# Altium PCB Attempt 2 - ClassD.PcbDoc (part 2 of 2)
Units mm, origin at the board's own origin, x right, y up, seen from the top; angles counter-clockwise.
Board outline 106 x 65 mm, 2 copper layers (Top Layer, Bottom Layer), stack 1.569 mm thick; 59 components, 29 nets, 154 pads, 172 vias.
Unrouted connection lines stored in the file: 2.
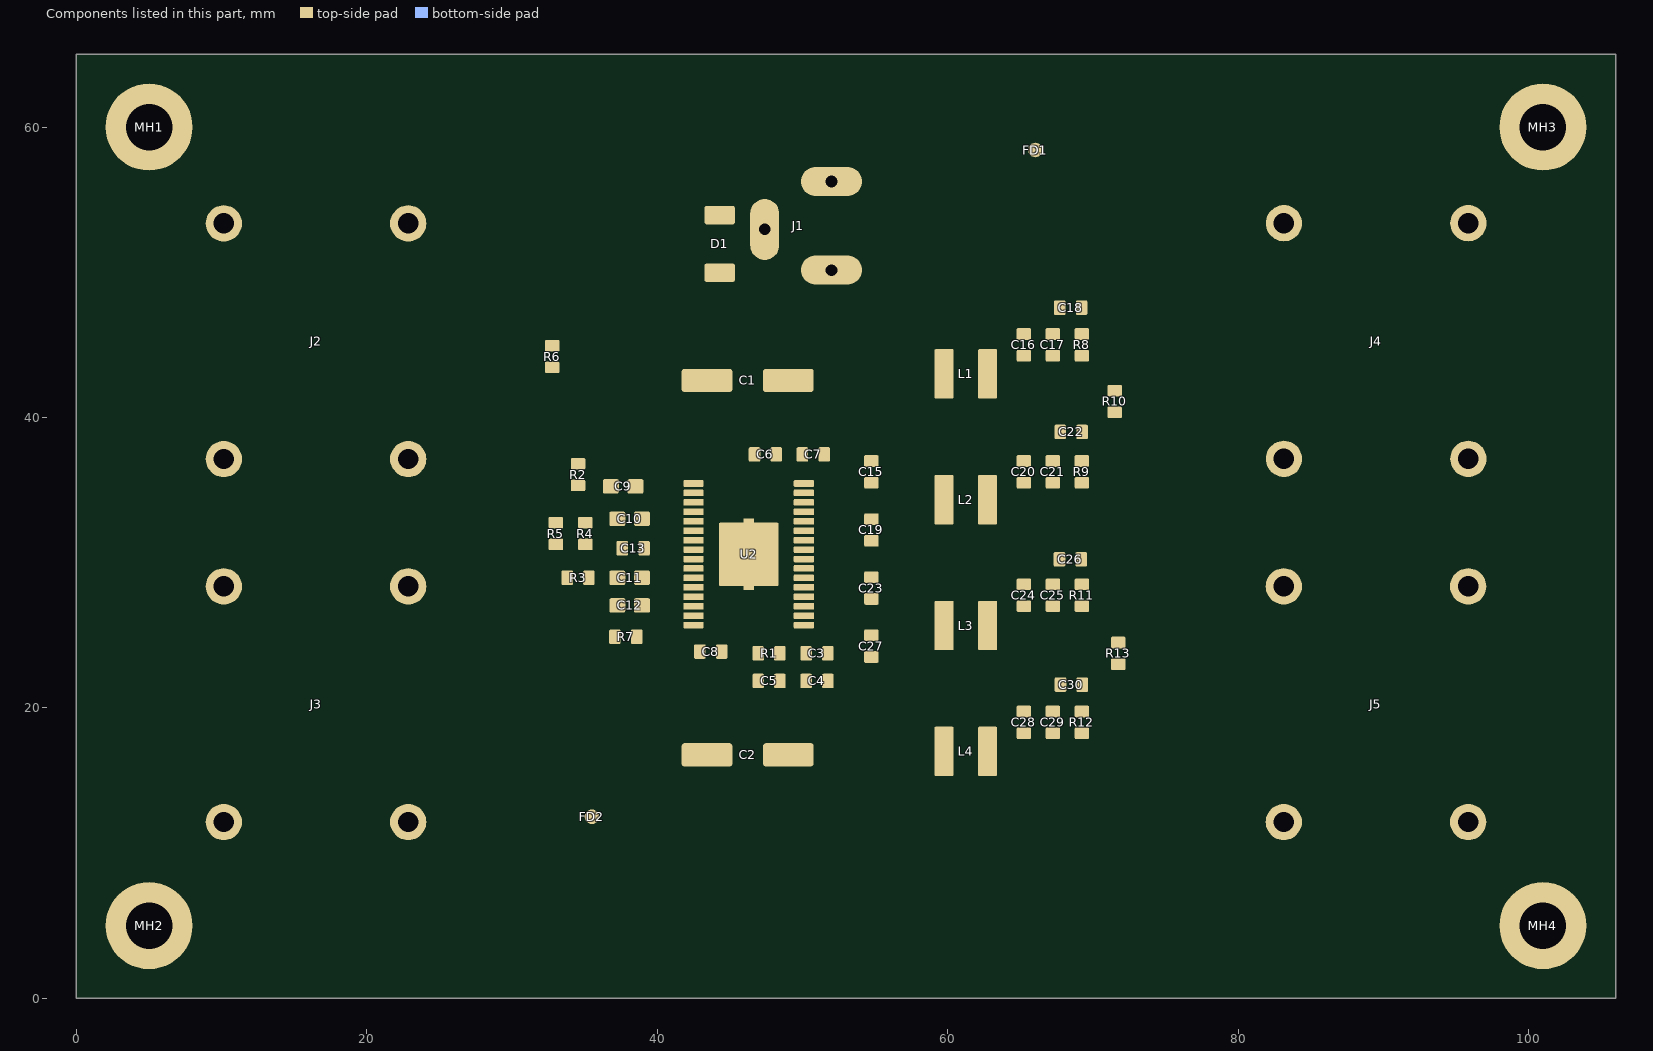
[diagram p2: the components of this part, seen from the top]

## Silkscreen, mask and mechanical layers (free items; w line width, h text height) (continued)
FEB note:
  text "N" at 0,283.767 h4.6
  text "O" at 3.006,283.767 h4.6
  text "T" at 6.011,283.767 h4.6
  text "E" at 8.043,283.767 h4.6
  text "S" at 10.371,283.767 h4.6
  text ":" at 12.784,283.767 h4.6
  text "U" at 14.858,283.767 h4.6
  text "N" at 17.737,283.767 h4.6
  text "L" at 20.743,283.767 h4.6
  text "E" at 22.817,283.767 h4.6
  text "S" at 25.187,283.767 h4.6
  text "S" at 27.558,283.767 h4.6
  text "O" at 30.818,283.767 h4.6
  text "T" at 33.823,283.767 h4.6
  text "H" at 35.855,283.767 h4.6
  text "E" at 38.818,283.767 h4.6
  text "R" at 41.147,283.767 h4.6
  text "W" at 43.729,283.767 h4.6
  text "I" at 47.496,283.767 h4.6
  text "S" at 48.597,283.767 h4.6
  text "E" at 51.01,283.767 h4.6
  text "S" at 54.227,283.767 h4.6
  text "P" at 56.64,283.767 h4.6
  text "E" at 59.095,283.767 h4.6
  text "C" at 61.423,283.767 h4.6
  text "I" at 64.344,283.767 h4.6
  text "F" at 65.445,283.767 h4.6
  text "I" at 67.646,283.767 h4.6
  text "E" at 68.747,283.767 h4.6
  text "D" at 71.117,283.767 h4.6
  text "." at 73.869,283.767 h4.6
  text "1" at 0,275.767 h4.6
  text "." at 2.244,275.767 h4.6
  text "F" at 4.318,275.767 h4.6
  text "A" at 6.392,275.767 h4.6
  text "B" at 8.89,275.767 h4.6
  text "R" at 11.43,275.767 h4.6
  text "I" at 14.012,275.767 h4.6
  text "C" at 15.112,275.767 h4.6
  text "A" at 18.033,275.767 h4.6
  text "T" at 20.319,275.767 h4.6
  text "E" at 22.351,275.767 h4.6
  text "P" at 25.567,275.767 h4.6
  text "E" at 28.023,275.767 h4.6
  text "R" at 30.393,275.767 h4.6
  text "I" at 33.822,275.767 h4.6
  text "P" at 34.923,275.767 h4.6
  text "C" at 37.336,275.767 h4.6
  text "-" at 40.298,275.767 h4.6
  text "6" at 41.695,275.767 h4.6
  text "0" at 43.939,275.767 h4.6
  text "1" at 46.182,275.767 h4.6
  text "2" at 48.468,275.767 h4.6
  text "A" at 50.712,275.767 h4.6
  text "C" at 54.056,275.767 h4.6
  text "L" at 56.977,275.767 h4.6
  text "A" at 59.136,275.767 h4.6
  text "S" at 61.676,275.767 h4.6
  text "S" at 64.046,275.767 h4.6
  text "2" at 67.306,275.767 h4.6
  text "." at 69.55,275.767 h4.6
  text "2" at 0,267.808 h4.6
  text "." at 2.244,267.808 h4.6
  text "M" at 4.318,267.808 h4.6
  text "A" at 7.662,267.808 h4.6
  text "T" at 9.948,267.808 h4.6
  text "E" at 11.98,267.808 h4.6
  text "R" at 14.35,267.808 h4.6
  text "I" at 16.933,267.808 h4.6
  text "A" at 18.033,267.808 h4.6
  text "L" at 20.531,267.808 h4.6
  text ":" at 22.647,267.808 h4.6
  text "D" at 4.275,259.808 h4.6
  text "I" at 7.196,259.808 h4.6
  text "E" at 8.297,259.808 h4.6
  text "L" at 10.667,259.808 h4.6
  text "E" at 12.784,259.808 h4.6
  text "C" at 15.112,259.808 h4.6
  text "T" at 17.948,259.808 h4.6
  text "R" at 19.98,259.808 h4.6
  text "I" at 22.562,259.808 h4.6
  text "C" at 23.663,259.808 h4.6
  text ":" at 26.583,259.808 h4.6
  text "F" at 28.658,259.808 h4.6
  text "R" at 30.859,259.808 h4.6
  text "4" at 33.441,259.808 h4.6
  text "P" at 36.531,259.808 h4.6
  text "E" at 38.987,259.808 h4.6
  text "R" at 41.315,259.808 h4.6
  text "I" at 44.744,259.808 h4.6
  text "P" at 45.844,259.808 h4.6
  text "C" at 48.257,259.808 h4.6
  text "-" at 51.22,259.808 h4.6
  text "4" at 52.659,259.808 h4.6
  text "1" at 54.902,259.808 h4.6
  text "0" at 57.146,259.808 h4.6
  text "1" at 59.389,259.808 h4.6
  text "W" at 62.522,259.808 h4.6
  text "I" at 66.29,259.808 h4.6
  text "T" at 67.39,259.808 h4.6
  text "H" at 69.422,259.808 h4.6
  text "M" at 73.274,259.808 h4.6
  text "I" at 76.619,259.808 h4.6
  text "N" at 77.719,259.808 h4.6
  text "T" at 81.571,259.808 h4.6
  text "G" at 83.519,259.808 h4.6
  text "1" at 87.371,259.808 h4.6
  text "8" at 89.614,259.808 h4.6
  text "0" at 91.858,259.808 h4.6
  text "D" at 94.991,259.808 h4.6
  text "E" at 97.911,259.808 h4.6
  text "G" at 100.24,259.808 h4.6
  text "R" at 103.245,259.808 h4.6
  text "E" at 105.827,259.808 h4.6
  text "E" at 108.198,259.808 h4.6
  text "C" at 111.415,259.808 h4.6
  text "." at 114.209,259.808 h4.6
  text "C" at 4.275,251.807 h4.6
  text "O" at 7.196,251.807 h4.6
  text "P" at 10.286,251.807 h4.6
  text "P" at 12.742,251.807 h4.6
  text "E" at 15.197,251.807 h4.6
  text "R" at 17.568,251.807 h4.6
  text ":" at 20.15,251.807 h4.6
  text "A" at 22.224,251.807 h4.6
  text "S" at 24.722,251.807 h4.6
  text "P" at 27.981,251.807 h4.6
  text "E" at 30.394,251.807 h4.6
  text "R" at 32.765,251.807 h4.6
  text "S" at 36.194,251.807 h4.6
  text "T" at 38.522,251.807 h4.6
  text "A" at 40.342,251.807 h4.6
  text "C" at 42.713,251.807 h4.6
  text "K" at 45.634,251.807 h4.6
  text "U" at 47.919,251.807 h4.6
  text "P" at 50.798,251.807 h4.6
  text "." at 52.661,251.807 h4.6
  text "U" at 4.275,243.806 h4.6
  text "." at 7.069,243.806 h4.6
  text "L" at 8.297,243.806 h4.6
  text "." at 10.413,243.806 h4.6
  text "R" at 12.488,243.806 h4.6
  text "A" at 15.028,243.806 h4.6
  text "T" at 17.314,243.806 h4.6
  text "I" at 19.345,243.806 h4.6
  text "N" at 20.446,243.806 h4.6
  text "G" at 23.452,243.806 h4.6
  text ":" at 26.457,243.806 h4.6
  text "9" at 28.531,243.806 h4.6
  text "4" at 30.775,243.806 h4.6
  text "V" at 33.019,243.806 h4.6
  text "-" at 35.303,243.806 h4.6
  text "0" at 36.743,243.806 h4.6
  text "M" at 39.833,243.806 h4.6
  text "I" at 43.219,243.806 h4.6
  text "N" at 44.32,243.806 h4.6
  text "I" at 47.326,243.806 h4.6
  text "M" at 48.426,243.806 h4.6
  text "U" at 51.77,243.806 h4.6
  text "M" at 54.649,243.806 h4.6
  text "3" at 0,235.848 h4.6
  text "." at 2.243,235.848 h4.6
  text "S" at 4.318,235.848 h4.6
  text "U" at 6.688,235.848 h4.6
  text "R" at 9.567,235.848 h4.6
  text "F" at 12.149,235.848 h4.6
  text "A" at 14.223,235.848 h4.6
  text "C" at 16.636,235.848 h4.6
  text "E" at 19.557,235.848 h4.6
  text "F" at 22.774,235.848 h4.6
  text "I" at 24.976,235.848 h4.6
  text "N" at 26.076,235.848 h4.6
  text "I" at 29.082,235.848 h4.6
  text "S" at 30.182,235.848 h4.6
  text "H" at 32.595,235.848 h4.6
  text ":" at 35.601,235.848 h4.6
  text "E" at 37.674,235.848 h4.6
  text "N" at 40.044,235.848 h4.6
  text "I" at 43.008,235.848 h4.6
  text "G" at 44.108,235.848 h4.6
  text "4" at 0,227.847 h4.6
  text "." at 2.243,227.847 h4.6
  text "S" at 4.318,227.847 h4.6
  text "O" at 6.731,227.847 h4.6
  text "L" at 9.821,227.847 h4.6
  text "D" at 11.937,227.847 h4.6
  text "E" at 14.858,227.847 h4.6
  text "R" at 17.229,227.847 h4.6
  text "M" at 20.657,227.847 h4.6
  text "A" at 24.001,227.847 h4.6
  text "S" at 26.499,227.847 h4.6
  text "K" at 28.912,227.847 h4.6
  text "O" at 32.171,227.847 h4.6
  text "N" at 35.262,227.847 h4.6
  text "B" at 39.114,227.847 h4.6
  text "O" at 41.611,227.847 h4.6
  text "T" at 44.617,227.847 h4.6
  text "H" at 46.649,227.847 h4.6
  text "S" at 50.501,227.847 h4.6
  text "I" at 52.914,227.847 h4.6
  text "D" at 54.015,227.847 h4.6
  text "E" at 56.893,227.847 h4.6
  text "S" at 59.264,227.847 h4.6
  text "O" at 62.523,227.847 h4.6
  text "F" at 65.614,227.847 h4.6
  text "T" at 68.661,227.847 h4.6
  text "H" at 70.693,227.847 h4.6
  text "E" at 73.699,227.847 h4.6
  text "B" at 76.916,227.847 h4.6
  text "O" at 79.456,227.847 h4.6
  text "A" at 82.462,227.847 h4.6
  text "R" at 84.959,227.847 h4.6
  text "D" at 87.541,227.847 h4.6
  text "S" at 91.309,227.847 h4.6
  text "H" at 93.722,227.847 h4.6
  text "A" at 96.727,227.847 h4.6
  text "L" at 99.225,227.847 h4.6
  text "L" at 101.342,227.847 h4.6
  text "B" at 104.305,227.847 h4.6
  text "E" at 106.845,227.847 h4.6
  text "I" at 110.058,227.847 h4.6
  text "P" at 111.159,227.847 h4.6
  text "C" at 113.572,227.847 h4.6
  text "-" at 116.535,227.847 h4.6
  text "S" at 117.974,227.847 h4.6
  text "M" at 120.387,227.847 h4.6
  text "-" at 123.731,227.847 h4.6
  text "8" at 125.128,227.847 h4.6
  text "4" at 127.372,227.847 h4.6
  text "0" at 129.615,227.847 h4.6
  text "C" at 131.901,227.847 h4.6
  text "A" at 135.668,227.847 h4.6
  text "N" at 138.166,227.847 h4.6
  text "D" at 141.171,227.847 h4.6
  text "G" at 144.939,227.847 h4.6
  text "R" at 147.944,227.847 h4.6
  text "E" at 150.526,227.847 h4.6
  text "E" at 152.897,227.847 h4.6
  text "N" at 155.267,227.847 h4.6
  text "I" at 0,222.683 h4.6
  text "N" at 1.101,222.683 h4.6
  text "C" at 4.953,222.683 h4.6
  text "O" at 7.874,222.683 h4.6
  text "L" at 10.964,222.683 h4.6
  text "O" at 12.953,222.683 h4.6
  text "R" at 16.044,222.683 h4.6
  text "A" at 19.472,222.683 h4.6
  text "N" at 21.969,222.683 h4.6
  text "D" at 24.975,222.683 h4.6
  text "A" at 28.743,222.683 h4.6
  text "P" at 31.24,222.683 h4.6
  text "P" at 33.695,222.683 h4.6
  text "L" at 36.151,222.683 h4.6
  text "E" at 38.267,222.683 h4.6
  text "D" at 40.595,222.683 h4.6
  text "B" at 44.363,222.683 h4.6
  text "A" at 46.861,222.683 h4.6
  text "R" at 49.358,222.683 h4.6
  text "E" at 51.94,222.683 h4.6
  text "C" at 55.158,222.683 h4.6
  text "O" at 58.078,222.683 h4.6
  text "P" at 61.169,222.683 h4.6
  text "P" at 63.624,222.683 h4.6
  text "E" at 66.079,222.683 h4.6
  text "E" at 68.407,222.683 h4.6
  text "R" at 70.778,222.683 h4.6
  text "." at 73.358,222.683 h4.6
  text "5" at 0,214.682 h4.6
  text "." at 2.243,214.682 h4.6
  text "S" at 4.318,214.682 h4.6
  text "I" at 6.731,214.682 h4.6
  text "L" at 7.831,214.682 h4.6
  text "K" at 9.948,214.682 h4.6
  text "S" at 13.207,214.682 h4.6
  text "C" at 15.62,214.682 h4.6
  text "R" at 18.541,214.682 h4.6
  text "E" at 21.123,214.682 h4.6
  text "E" at 23.494,214.682 h4.6
  text "N" at 25.822,214.682 h4.6
  text "L" at 29.673,214.682 h4.6
  text "E" at 31.79,214.682 h4.6
  text "G" at 34.118,214.682 h4.6
  text "E" at 37.124,214.682 h4.6
  text "N" at 39.452,214.682 h4.6
  text "D" at 42.415,214.682 h4.6
  text "T" at 46.182,214.682 h4.6
  text "O" at 48.087,214.682 h4.6
  text "B" at 52.024,214.682 h4.6
  text "E" at 54.564,214.682 h4.6
  text "A" at 57.781,214.682 h4.6
  text "P" at 60.278,214.682 h4.6
  text "P" at 62.734,214.682 h4.6
  text "L" at 65.189,214.682 h4.6
  text "I" at 67.305,214.682 h4.6
  text "E" at 68.406,214.682 h4.6
  text "D" at 70.777,214.682 h4.6
  text "P" at 74.543,214.682 h4.6
  text "E" at 76.999,214.682 h4.6
  text "R" at 79.369,214.682 h4.6
  text "L" at 82.798,214.682 h4.6
  text "A" at 84.915,214.682 h4.6
  text "Y" at 87.201,214.682 h4.6
  text "E" at 89.487,214.682 h4.6
  text "R" at 91.857,214.682 h4.6
  text "S" at 95.286,214.682 h4.6
  text "T" at 97.614,214.682 h4.6
  text "A" at 99.435,214.682 h4.6
  text "C" at 101.847,214.682 h4.6
  text "K" at 104.768,214.682 h4.6
  text "U" at 107.054,214.682 h4.6
  text "P" at 109.931,214.682 h4.6
  text "U" at 113.233,214.682 h4.6
  text "S" at 116.112,214.682 h4.6
  text "I" at 118.525,214.682 h4.6
  text "N" at 119.625,214.682 h4.6
  text "G" at 122.589,214.682 h4.6
  text "W" at 126.441,214.682 h4.6
  text "H" at 130.208,214.682 h4.6
  text "I" at 133.214,214.682 h4.6
  text "T" at 134.314,214.682 h4.6
  text "E" at 136.346,214.682 h4.6
  text "N" at 139.564,214.682 h4.6
  text "O" at 142.569,214.682 h4.6
  text "N" at 145.659,214.682 h4.6
  text "-" at 148.664,214.682 h4.6
  text "C" at 0,209.517 h4.6
  text "O" at 2.921,209.517 h4.6
  text "N" at 6.011,209.517 h4.6
  text "D" at 9.017,209.517 h4.6
  text "U" at 11.895,209.517 h4.6
  text "C" at 14.774,209.517 h4.6
  text "T" at 17.61,209.517 h4.6
  text "I" at 19.642,209.517 h4.6
  text "V" at 20.743,209.517 h4.6
  text "E" at 23.24,209.517 h4.6
  text "E" at 26.457,209.517 h4.6
  text "P" at 28.828,209.517 h4.6
  text "O" at 31.241,209.517 h4.6
  text "X" at 34.246,209.517 h4.6
  text "Y" at 36.617,209.517 h4.6
  text "I" at 39.75,209.517 h4.6
  text "N" at 40.808,209.517 h4.6
  text "K" at 43.813,209.517 h4.6
  text "." at 46.226,209.517 h4.6
  text "6" at 0,201.517 h4.6
  text "." at 2.243,201.517 h4.6
  text "1" at 4.318,201.517 h4.6
  text "0" at 6.561,201.517 h4.6
  text "0" at 8.847,201.517 h4.6
  text "%" at 11.091,201.517 h4.6
  text "C" at 15.451,201.517 h4.6
  text "O" at 18.372,201.517 h4.6
  text "N" at 21.462,201.517 h4.6
  text "T" at 24.468,201.517 h4.6
  text "I" at 26.5,201.517 h4.6
  text "N" at 27.6,201.517 h4.6
  text "U" at 30.606,201.517 h4.6
  text "I" at 33.484,201.517 h4.6
  text "T" at 34.585,201.517 h4.6
  text "Y" at 36.617,201.517 h4.6
  text "T" at 39.749,201.517 h4.6
  text "E" at 41.781,201.517 h4.6
  text "S" at 44.152,201.517 h4.6
  text "T" at 46.48,201.517 h4.6
  text "I" at 48.512,201.517 h4.6
  text "N" at 49.613,201.517 h4.6
  text "G" at 52.618,201.517 h4.6
  text "U" at 56.471,201.517 h4.6
  text "S" at 59.307,201.517 h4.6
  text "I" at 61.72,201.517 h4.6
  text "N" at 62.82,201.517 h4.6
  text "G" at 65.826,201.517 h4.6
  text "D" at 69.678,201.517 h4.6
  text "A" at 72.514,201.517 h4.6
  text "T" at 74.8,201.517 h4.6
  text "A" at 76.62,201.517 h4.6
  text "B" at 79.118,201.517 h4.6
  text "A" at 81.616,201.517 h4.6
  text "S" at 84.071,201.517 h4.6
  text "E" at 86.484,201.517 h4.6
  text "N" at 89.701,201.517 h4.6
  text "E" at 92.707,201.517 h4.6
  text "T" at 95.035,201.517 h4.6
  text "L" at 97.067,201.517 h4.6
  text "I" at 99.183,201.517 h4.6
  text "S" at 100.284,201.517 h4.6
  text "T" at 102.612,201.517 h4.6
  text "S" at 105.491,201.517 h4.6
  text "H" at 107.861,201.517 h4.6
  text "A" at 110.867,201.517 h4.6
  text "L" at 113.365,201.517 h4.6
  text "L" at 115.481,201.517 h4.6
  text "B" at 118.444,201.517 h4.6
  text "E" at 120.984,201.517 h4.6
  text "P" at 124.201,201.517 h4.6
  text "E" at 126.657,201.517 h4.6
  text "R" at 129.027,201.517 h4.6
  text "F" at 131.61,201.517 h4.6
  text "O" at 133.811,201.517 h4.6
  text "R" at 136.901,201.517 h4.6
  text "M" at 139.483,201.517 h4.6
  text "E" at 142.827,201.517 h4.6
  text "D" at 145.198,201.517 h4.6
  text "," at 147.907,201.517 h4.6
  text "V" at 0,196.352 h4.6
  text "E" at 2.498,196.352 h4.6
  text "N" at 4.868,196.352 h4.6
  text "D" at 7.831,196.352 h4.6
  text "O" at 10.752,196.352 h4.6
  text "R" at 13.843,196.352 h4.6
  text "T" at 17.271,196.352 h4.6
  text "O" at 19.176,196.352 h4.6
  text "I" at 23.113,196.352 h4.6
  text "D" at 24.214,196.352 h4.6
  text "E" at 27.135,196.352 h4.6
  text "N" at 29.505,196.352 h4.6
  text "T" at 32.511,196.352 h4.6
  text "I" at 34.543,196.352 h4.6
  text "F" at 35.643,196.352 h4.6
  text "Y" at 37.845,196.352 h4.6
  text "T" at 40.977,196.352 h4.6
  text "E" at 43.009,196.352 h4.6
  text "S" at 45.38,196.352 h4.6
  text "T" at 47.708,196.352 h4.6
  text "P" at 50.587,196.352 h4.6
  text "A" at 52.83,196.352 h4.6
  text "S" at 55.328,196.352 h4.6
  text "S" at 57.698,196.352 h4.6
  text "E" at 60.111,196.352 h4.6
  text "D" at 62.439,196.352 h4.6
  text "I" at 66.207,196.352 h4.6
  text "N" at 67.308,196.352 h4.6
  text "S" at 71.16,196.352 h4.6
  text "E" at 73.573,196.352 h4.6
  text "C" at 75.901,196.352 h4.6
  text "O" at 78.822,196.352 h4.6
  text "N" at 81.912,196.352 h4.6
  text "D" at 84.875,196.352 h4.6
  text "A" at 87.712,196.352 h4.6
  text "R" at 90.209,196.352 h4.6
  text "Y" at 92.664,196.352 h4.6
  text "S" at 95.797,196.352 h4.6
  text "I" at 98.21,196.352 h4.6
  text "D" at 99.31,196.352 h4.6
  text "E" at 102.231,196.352 h4.6
  text "." at 104.602,196.352 h4.6
  text "7" at 0,188.351 h4.6
  text "." at 2.243,188.351 h4.6
  text "V" at 4.318,188.351 h4.6
  text "E" at 6.815,188.351 h4.6
  text "N" at 9.186,188.351 h4.6
  text "D" at 12.191,188.351 h4.6
  text "O" at 15.112,188.351 h4.6
  text "R" at 18.203,188.351 h4.6
  text "T" at 21.631,188.351 h4.6
  text "O" at 23.536,188.351 h4.6
  text "M" at 27.473,188.351 h4.6
  text "A" at 30.817,188.351 h4.6
  text "K" at 33.315,188.351 h4.6
  text "E" at 35.728,188.351 h4.6
  text "D" at 38.945,188.351 h4.6
  text "A" at 41.739,188.351 h4.6
  text "T" at 44.025,188.351 h4.6
  text "E" at 46.057,188.351 h4.6
  text "C" at 49.274,188.351 h4.6
  text "O" at 52.195,188.351 h4.6
  text "D" at 55.285,188.351 h4.6
  text "E" at 58.206,188.351 h4.6
  text "A" at 61.423,188.351 h4.6
  text "N" at 63.921,188.351 h4.6
  text "D" at 66.927,188.351 h4.6
  text "L" at 70.694,188.351 h4.6
  text "O" at 72.684,188.351 h4.6
  text "G" at 75.774,188.351 h4.6
  text "O" at 78.779,188.351 h4.6
  text "I" at 82.716,188.351 h4.6
  text "N" at 83.817,188.351 h4.6
  text "E" at 87.669,188.351 h4.6
  text "A" at 90.04,188.351 h4.6
  text "C" at 92.453,188.351 h4.6
  text "H" at 95.373,188.351 h4.6
  text "O" at 99.226,188.351 h4.6
  text "R" at 102.316,188.351 h4.6
  text "I" at 105.745,188.351 h4.6
  text "N" at 106.845,188.351 h4.6
  text "L" at 110.698,188.351 h4.6
  text "E" at 112.814,188.351 h4.6
  text "G" at 115.142,188.351 h4.6
  text "E" at 118.148,188.351 h4.6
  text "N" at 120.519,188.351 h4.6
  text "D" at 123.482,188.351 h4.6
  text "." at 126.191,188.351 h4.6
  text "8" at 0,180.393 h4.6
  text "." at 2.243,180.393 h4.6
  text "B" at 4.318,180.393 h4.6
  text "O" at 6.858,180.393 h4.6
  text "W" at 9.99,180.393 h4.6
  text "A" at 14.604,180.393 h4.6
  text "N" at 17.102,180.393 h4.6
  text "D" at 20.107,180.393 h4.6
  text "T" at 23.875,180.393 h4.6
  text "W" at 25.949,180.393 h4.6
  text "I" at 29.717,180.393 h4.6
  text "S" at 30.817,180.393 h4.6
  text "T" at 33.146,180.393 h4.6
  text "S" at 36.023,180.393 h4.6
  text "H" at 38.436,180.393 h4.6
  text "A" at 41.441,180.393 h4.6
  text "L" at 43.939,180.393 h4.6
  text "L" at 46.056,180.393 h4.6
  text "N" at 49.019,180.393 h4.6
  text "O" at 52.024,180.393 h4.6
  text "T" at 55.03,180.393 h4.6
  text "E" at 57.909,180.393 h4.6
  text "X" at 60.279,180.393 h4.6
  text "C" at 62.523,180.393 h4.6
  text "E" at 65.444,180.393 h4.6
  text "E" at 67.814,180.393 h4.6
  text "D" at 70.142,180.393 h4.6
  text "0" at 73.91,180.393 h4.6
  text "." at 76.154,180.393 h4.6
  text "7" at 77.381,180.393 h4.6
  text "%" at 79.625,180.393 h4.6
  text "O" at 83.985,180.393 h4.6
  text "F" at 87.075,180.393 h4.6
  text "L" at 90.123,180.393 h4.6
  text "O" at 92.113,180.393 h4.6
  text "N" at 95.203,180.393 h4.6
  text "G" at 98.208,180.393 h4.6
  text "E" at 101.214,180.393 h4.6
  text "S" at 103.585,180.393 h4.6
  text "T" at 105.913,180.393 h4.6
  text "S" at 108.791,180.393 h4.6
  text "I" at 111.204,180.393 h4.6
  text "D" at 112.305,180.393 h4.6
  text "E" at 115.226,180.393 h4.6
  text "." at 117.596,180.393 h4.6
  text "9" at 0,172.392 h4.6
  text "." at 2.243,172.392 h4.6
  text "D" at 4.318,172.392 h4.6
  text "I" at 7.239,172.392 h4.6
  text "E" at 8.339,172.392 h4.6
  text "L" at 10.71,172.392 h4.6
  text "E" at 12.826,172.392 h4.6
  text "C" at 15.155,172.392 h4.6
  text "T" at 17.991,172.392 h4.6
  text "R" at 20.023,172.392 h4.6
  text "I" at 22.605,172.392 h4.6
  text "C" at 23.706,172.392 h4.6
  text "S" at 26.626,172.392 h4.6
  text "A" at 29.885,172.392 h4.6
  text "N" at 32.383,172.392 h4.6
  text "D" at 35.346,172.392 h4.6
  text "L" at 39.114,172.392 h4.6
  text "I" at 41.23,172.392 h4.6
  text "N" at 42.331,172.392 h4.6
  text "E" at 45.336,172.392 h4.6
  text "W" at 47.707,172.392 h4.6
  text "I" at 51.474,172.392 h4.6
  text "D" at 52.575,172.392 h4.6
  text "T" at 55.369,172.392 h4.6
  text "H" at 57.401,172.392 h4.6
  text "S" at 60.364,172.392 h4.6
  text "M" at 63.624,172.392 h4.6
  text "A" at 66.968,172.392 h4.6
  text "Y" at 69.254,172.392 h4.6
  text "B" at 72.385,172.392 h4.6
  text "E" at 74.925,172.392 h4.6
  text "A" at 78.142,172.392 h4.6
  text "D" at 80.639,172.392 h4.6
  text "J" at 83.433,172.392 h4.6
  text "U" at 84.83,172.392 h4.6
  text "S" at 87.709,172.392 h4.6
  text "T" at 90.037,172.392 h4.6
  text "E" at 92.069,172.392 h4.6
  text "D" at 94.397,172.392 h4.6
  text "T" at 98.164,172.392 h4.6
  text "O" at 100.069,172.392 h4.6
  text "M" at 104.005,172.392 h4.6
  text "E" at 107.35,172.392 h4.6
  text "E" at 109.72,172.392 h4.6
  text "T" at 112.049,172.392 h4.6
  text "T" at 114.927,172.392 h4.6
  text "H" at 116.959,172.392 h4.6
  text "E" at 119.965,172.392 h4.6
  text "I" at 123.182,172.392 h4.6
  text "M" at 124.282,172.392 h4.6
  text "P" at 127.627,172.392 h4.6
  text "E" at 130.082,172.392 h4.6
  text "D" at 132.452,172.392 h4.6
  text "A" at 135.289,172.392 h4.6
  text "N" at 137.744,172.392 h4.6
  text "C" at 140.748,172.392 h4.6
  text "E" at 143.669,172.392 h4.6
  text "." at 146.039,172.392 h4.6
  text "1" at 0,164.392 h4.6
  text "0" at 2.243,164.392 h4.6
  text "." at 4.487,164.392 h4.6
  text "M" at 7.408,164.392 h4.6
  text "I" at 10.752,164.392 h4.6
  text "N" at 11.853,164.392 h4.6
  text "I" at 14.858,164.392 h4.6
  text "M" at 15.959,164.392 h4.6
  text "U" at 19.303,164.392 h4.6
  text "M" at 22.182,164.392 h4.6
  text "C" at 26.372,164.392 h4.6
  text "O" at 29.293,164.392 h4.6
  text "N" at 32.384,164.392 h4.6
  text "D" at 35.389,164.392 h4.6
  text "U" at 38.268,164.392 h4.6
  text "C" at 41.189,164.392 h4.6
  text "T" at 44.025,164.392 h4.6
  text "O" at 45.93,164.392 h4.6
  text "R" at 49.02,164.392 h4.6
  text "W" at 52.449,164.392 h4.6
  text "I" at 56.216,164.392 h4.6
  text "D" at 57.317,164.392 h4.6
  text "T" at 60.111,164.392 h4.6
  text "H" at 62.143,164.392 h4.6
  text ":" at 65.148,164.392 h4.6
  text "6" at 67.223,164.392 h4.6
  text "M" at 70.313,164.392 h4.6
  text "M" at 73.657,164.392 h4.6
  text "I" at 77.001,164.392 h4.6
  text "L" at 78.102,164.392 h4.6
  text "M" at 29.208,156.391 h4.6
  text "I" at 32.552,156.391 h4.6
  text "N" at 33.653,156.391 h4.6
  text "I" at 36.658,156.391 h4.6
  text "M" at 37.759,156.391 h4.6
  text "U" at 41.103,156.391 h4.6
  text "M" at 43.981,156.391 h4.6
  text "S" at 48.172,156.391 h4.6
  text "P" at 50.585,156.391 h4.6
  text "A" at 52.828,156.391 h4.6
  text "C" at 55.241,156.391 h4.6
  text "I" at 58.162,156.391 h4.6
  text "N" at 59.263,156.391 h4.6
  text "G" at 62.268,156.391 h4.6
  text ":" at 65.274,156.391 h4.6
  text "3" at 67.348,156.391 h4.6
  text "." at 69.592,156.391 h4.6
  text "4" at 70.819,156.391 h4.6
  text "M" at 73.908,156.391 h4.6
  text "I" at 77.253,156.391 h4.6
  text "N" at 78.353,156.391 h4.6
  text "." at 81.359,156.391 h4.6
  text "1" at 0,148.433 h4.6
  text "1" at 2.244,148.433 h4.6
  text "." at 4.487,148.433 h4.6
  text "R" at 6.561,148.433 h4.6
  text "E" at 9.143,148.433 h4.6
  text "Q" at 11.472,148.433 h4.6
  text "U" at 14.562,148.433 h4.6
  text "E" at 17.44,148.433 h4.6
  text "S" at 19.811,148.433 h4.6
  text "T" at 22.139,148.433 h4.6
  text "F" at 25.018,148.433 h4.6
  text "A" at 27.092,148.433 h4.6
  text "B" at 29.59,148.433 h4.6
  text "R" at 32.13,148.433 h4.6
  text "I" at 34.712,148.433 h4.6
  text "C" at 35.812,148.433 h4.6
  text "A" at 38.733,148.433 h4.6
  text "T" at 41.019,148.433 h4.6
  text "O" at 42.924,148.433 h4.6
  text "R" at 46.014,148.433 h4.6
  text "T" at 49.443,148.433 h4.6
  text "O" at 51.348,148.433 h4.6
  text "A" at 55.285,148.433 h4.6
  text "D" at 57.783,148.433 h4.6
  text "D" at 60.704,148.433 h4.6
  text "T" at 64.471,148.433 h4.6
  text "E" at 66.503,148.433 h4.6
  text "A" at 68.874,148.433 h4.6
  text "R" at 71.371,148.433 h4.6
  text "D" at 74.8,148.433 h4.6
  text "R" at 77.721,148.433 h4.6
  text "O" at 80.219,148.433 h4.6
  text "P" at 83.309,148.433 h4.6
  text "S" at 85.764,148.433 h4.6
  text "I" at 89.024,148.433 h4.6
  text "F" at 90.124,148.433 h4.6
  text "N" at 93.172,148.433 h4.6
  text "O" at 96.178,148.433 h4.6
  text "T" at 99.183,148.433 h4.6
  text "A" at 102.062,148.433 h4.6
  text "D" at 104.559,148.433 h4.6
  text "D" at 107.48,148.433 h4.6
  text "E" at 110.401,148.433 h4.6
  text "D" at 112.729,148.433 h4.6
  text "I" at 116.497,148.433 h4.6
  text "N" at 117.598,148.433 h4.6
  text "T" at 121.445,148.433 h4.6
  text "H" at 123.477,148.433 h4.6
  text "E" at 126.483,148.433 h4.6
  text "G" at 129.657,148.433 h4.6
  text "E" at 132.663,148.433 h4.6
  text "R" at 135.033,148.433 h4.6
  text "B" at 137.616,148.433 h4.6
  text "E" at 140.156,148.433 h4.6
  text "R" at 142.526,148.433 h4.6
  text "." at 145.108,148.433 h4.6
  text "1" at 0,140.432 h4.6
  text "2" at 2.243,140.432 h4.6
  text "." at 4.487,140.432 h4.6
  text "A" at 6.561,140.432 h4.6
  text "U" at 8.974,140.432 h4.6
  text "T" at 11.853,140.432 h4.6
  text "O" at 13.8,140.432 h4.6
  text "M" at 16.89,140.432 h4.6
  text "A" at 20.234,140.432 h4.6
  text "T" at 22.52,140.432 h4.6
  text "I" at 24.552,140.432 h4.6
  text "C" at 25.653,140.432 h4.6
  text "I" at 29.42,140.432 h4.6
  text "N" at 30.521,140.432 h4.6
  text "S" at 33.527,140.432 h4.6
  text "P" at 35.939,140.432 h4.6
  text "E" at 38.395,140.432 h4.6
  text "C" at 40.723,140.432 h4.6
  text "T" at 43.559,140.432 h4.6
  text "I" at 45.591,140.432 h4.6
  text "O" at 46.692,140.432 h4.6
  text "N" at 49.782,140.432 h4.6
  text "O" at 53.634,140.432 h4.6
  text "F" at 56.724,140.432 h4.6
  text "A" at 59.772,140.432 h4.6
  text "L" at 62.27,140.432 h4.6
  text "L" at 64.386,140.432 h4.6
  text "L" at 67.392,140.432 h4.6
  text "A" at 69.551,140.432 h4.6
  text "Y" at 71.837,140.432 h4.6
  text "E" at 74.123,140.432 h4.6
  text "R" at 76.493,140.432 h4.6
  text "S" at 79.076,140.432 h4.6
  text "R" at 82.293,140.432 h4.6
  text "E" at 84.875,140.432 h4.6
  text "Q" at 87.203,140.432 h4.6
  text "U" at 90.294,140.432 h4.6
  text "I" at 93.172,140.432 h4.6
  text "R" at 94.273,140.432 h4.6
  text "E" at 96.813,140.432 h4.6
  text "D" at 99.183,140.432 h4.6
  text "." at 101.935,140.432 h4.6
  text "1" at 0,132.431 h4.6
  text "3" at 2.243,132.431 h4.6
  text "." at 4.487,132.431 h4.6
  text "N" at 6.561,132.431 h4.6
  text "U" at 9.567,132.431 h4.6
  text "M" at 12.445,132.431 h4.6
  text "B" at 15.79,132.431 h4.6
  text "E" at 18.33,132.431 h4.6
  text "R" at 20.7,132.431 h4.6
  text "O" at 24.129,132.431 h4.6
  text "F" at 27.219,132.431 h4.6
  text "L" at 30.309,132.431 h4.6
  text "A" at 32.468,132.431 h4.6
  text "Y" at 34.754,132.431 h4.6
  text "E" at 37.04,132.431 h4.6
  text "R" at 39.411,132.431 h4.6
  text "S" at 41.951,132.431 h4.6
  text "I" at 45.21,132.431 h4.6
  text "S" at 46.311,132.431 h4.6
  text "6" at 49.57,132.431 h4.6
  text "1" at 0,124.473 h4.6
  text "4" at 2.243,124.473 h4.6
  text "." at 4.487,124.473 h4.6
  text "B" at 6.561,124.473 h4.6
  text "O" at 9.101,124.473 h4.6
  text "A" at 12.107,124.473 h4.6
  text "R" at 14.604,124.473 h4.6
  text "D" at 17.187,124.473 h4.6
  text "T" at 20.954,124.473 h4.6
  text "H" at 22.986,124.473 h4.6
  text "I" at 25.992,124.473 h4.6
  text "C" at 27.092,124.473 h4.6
  text "K" at 30.013,124.473 h4.6
  text "N" at 32.426,124.473 h4.6
  text "E" at 35.432,124.473 h4.6
  text "S" at 37.802,124.473 h4.6
  text "S" at 40.173,124.473 h4.6
  text "I" at 43.39,124.473 h4.6
  text "S" at 44.491,124.473 h4.6
  text "1" at 47.75,124.473 h4.6
  text "." at 49.994,124.473 h4.6
  text "6" at 51.221,124.473 h4.6
  text "M" at 53.465,124.473 h4.6
  text "M" at 56.809,124.473 h4.6
  text "1" at 0,116.472 h4.6
  text "5" at 2.243,116.472 h4.6
  text "." at 4.487,116.472 h4.6
  text "R" at 6.561,116.472 h4.6
  text "E" at 9.143,116.472 h4.6
  text "Q" at 11.472,116.472 h4.6
  text "U" at 14.562,116.472 h4.6
  text "E" at 17.44,116.472 h4.6
  text "S" at 19.811,116.472 h4.6
  text "T" at 22.139,116.472 h4.6
  text "F" at 25.018,116.472 h4.6
  text "A" at 27.092,116.472 h4.6
  text "B" at 29.59,116.472 h4.6
  text "R" at 32.13,116.472 h4.6
  text "I" at 34.712,116.472 h4.6
  text "C" at 35.812,116.472 h4.6
  text "A" at 38.733,116.472 h4.6
  text "T" at 41.019,116.472 h4.6
  text "O" at 42.924,116.472 h4.6
  text "R" at 46.014,116.472 h4.6
  text "T" at 49.443,116.472 h4.6
  text "O" at 51.348,116.472 h4.6
  text "A" at 55.285,116.472 h4.6
  text "D" at 57.783,116.472 h4.6
  text "D" at 60.704,116.472 h4.6
  text "T" at 64.471,116.472 h4.6
  text "E" at 66.503,116.472 h4.6
  text "A" at 68.874,116.472 h4.6
  text "R" at 71.371,116.472 h4.6
  text "D" at 74.8,116.472 h4.6
  text "R" at 77.721,116.472 h4.6
  text "O" at 80.219,116.472 h4.6
  text "P" at 83.309,116.472 h4.6
  text "S" at 85.764,116.472 h4.6
  text "I" at 89.024,116.472 h4.6
  text "F" at 90.124,116.472 h4.6
  text "N" at 93.172,116.472 h4.6
  text "O" at 96.178,116.472 h4.6
  text "T" at 99.183,116.472 h4.6
  text "A" at 102.062,116.472 h4.6
  text "D" at 104.559,116.472 h4.6
  text "D" at 107.48,116.472 h4.6
  text "E" at 110.401,116.472 h4.6
  text "D" at 112.729,116.472 h4.6
  text "I" at 116.497,116.472 h4.6
  text "N" at 117.598,116.472 h4.6
  text "G" at 121.45,116.472 h4.6
  text "E" at 124.455,116.472 h4.6
  text "R" at 126.784,116.472 h4.6
  text "B" at 129.366,116.472 h4.6
  text "E" at 131.906,116.472 h4.6
  text "R" at 134.276,116.472 h4.6
  text "." at 136.858,116.472 h4.6
  text "1" at 0,108.471 h4.6
  text "6" at 2.243,108.471 h4.6
  text "." at 4.487,108.471 h4.6
  text "A" at 6.561,108.471 h4.6
  text "U" at 8.974,108.471 h4.6
  text "T" at 11.853,108.471 h4.6
  text "O" at 13.8,108.471 h4.6
  text "M" at 16.89,108.471 h4.6
  text "A" at 20.234,108.471 h4.6
  text "T" at 22.52,108.471 h4.6
  text "I" at 24.552,108.471 h4.6
  text "C" at 25.653,108.471 h4.6
  text "I" at 29.42,108.471 h4.6
  text "N" at 30.521,108.471 h4.6
  text "S" at 33.527,108.471 h4.6
  text "P" at 35.939,108.471 h4.6
  text "E" at 38.395,108.471 h4.6
  text "C" at 40.723,108.471 h4.6
  text "T" at 43.559,108.471 h4.6
  text "I" at 45.591,108.471 h4.6
  text "O" at 46.692,108.471 h4.6
  text "N" at 49.782,108.471 h4.6
  text "O" at 53.634,108.471 h4.6
  text "F" at 56.724,108.471 h4.6
  text "A" at 59.772,108.471 h4.6
  text "L" at 62.27,108.471 h4.6
  text "L" at 64.386,108.471 h4.6
  text "L" at 67.392,108.471 h4.6
  text "A" at 69.551,108.471 h4.6
  text "Y" at 71.837,108.471 h4.6
  text "E" at 74.123,108.471 h4.6
  text "R" at 76.493,108.471 h4.6
  text "S" at 79.076,108.471 h4.6
  text "R" at 82.293,108.471 h4.6
  text "E" at 84.875,108.471 h4.6
  text "Q" at 87.203,108.471 h4.6
  text "U" at 90.294,108.471 h4.6
  text "I" at 93.172,108.471 h4.6
  text "R" at 94.273,108.471 h4.6
  text "E" at 96.813,108.471 h4.6
  text "D" at 99.183,108.471 h4.6
  text "." at 101.935,108.471 h4.6
  text "1" at 0,100.471 h4.6
  text "7" at 2.243,100.471 h4.6
  text "." at 4.487,100.471 h4.6
  text "N" at 6.561,100.471 h4.6
  text "U" at 9.567,100.471 h4.6
  text "M" at 12.445,100.471 h4.6
  text "B" at 15.79,100.471 h4.6
  text "E" at 18.33,100.471 h4.6
  text "R" at 20.7,100.471 h4.6
  text "O" at 24.129,100.471 h4.6
  text "F" at 27.219,100.471 h4.6
  text "L" at 30.309,100.471 h4.6
  text "A" at 32.468,100.471 h4.6
  text "Y" at 34.754,100.471 h4.6
  text "E" at 37.04,100.471 h4.6
  text "R" at 39.411,100.471 h4.6
  text "S" at 41.951,100.471 h4.6
  text "I" at 45.21,100.471 h4.6
  text "S" at 46.311,100.471 h4.6
  text "2" at 49.564,100.471 h4.6
  text "." at 51.812,100.471 h4.6
  text "1" at 0,92.512 h4.6
  text "8" at 2.244,92.512 h4.6
  text "." at 4.487,92.512 h4.6
  text "A" at 6.561,92.512 h4.6
  text "L" at 9.059,92.512 h4.6
  text "L" at 11.175,92.512 h4.6
  text "V" at 14.139,92.512 h4.6
  text "I" at 16.636,92.512 h4.6
  text "A" at 17.737,92.512 h4.6
  text "S" at 20.234,92.512 h4.6
  text "A" at 23.494,92.512 h4.6
  text "R" at 25.991,92.512 h4.6
  text "E" at 28.574,92.512 h4.6
  text "T" at 31.791,92.512 h4.6
  text "E" at 33.823,92.512 h4.6
  text "N" at 36.193,92.512 h4.6
  text "T" at 39.199,92.512 h4.6
  text "E" at 41.189,92.512 h4.6
  text "D" at 43.559,92.512 h4.6
  text "O" at 47.327,92.512 h4.6
  text "N" at 50.417,92.512 h4.6
  text "B" at 54.269,92.512 h4.6
  text "O" at 56.809,92.512 h4.6
  text "T" at 59.815,92.512 h4.6
  text "H" at 61.847,92.512 h4.6
  text "S" at 65.699,92.512 h4.6
  text "I" at 68.112,92.512 h4.6
  text "D" at 69.17,92.512 h4.6
  text "E" at 72.091,92.512 h4.6
  text "S" at 74.419,92.512 h4.6
  text "U" at 77.679,92.512 h4.6
  text "N" at 80.557,92.512 h4.6
  text "L" at 83.563,92.512 h4.6
  text "E" at 85.679,92.512 h4.6
  text "S" at 88.05,92.512 h4.6
  text "S" at 90.42,92.512 h4.6
  text "S" at 93.68,92.512 h4.6
  text "O" at 96.093,92.512 h4.6
  text "L" at 99.183,92.512 h4.6
  text "D" at 101.3,92.512 h4.6
  text "E" at 104.221,92.512 h4.6
  text "R" at 106.591,92.512 h4.6
  text "M" at 109.173,92.512 h4.6
  text "A" at 112.475,92.512 h4.6
  text "S" at 114.973,92.512 h4.6
  text "K" at 117.386,92.512 h4.6
  text "O" at 120.645,92.512 h4.6
  text "P" at 123.736,92.512 h4.6
  text "E" at 126.149,92.512 h4.6
  text "N" at 128.519,92.512 h4.6
  text "E" at 131.525,92.512 h4.6
  text "D" at 133.853,92.512 h4.6
  text "I" at 137.62,92.512 h4.6
  text "N" at 138.721,92.512 h4.6
  text "G" at 142.573,92.512 h4.6
  text "E" at 145.579,92.512 h4.6
  text "R" at 147.949,92.512 h4.6
  text "B" at 150.532,92.512 h4.6
  text "E" at 153.072,92.512 h4.6
  text "R" at 155.442,92.512 h4.6
  text "." at 157.982,92.512 h4.6
  text "1" at 0,84.512 h4.6
  text "9" at 2.244,84.512 h4.6
  text "." at 4.487,84.512 h4.6
  text "B" at 6.561,84.512 h4.6
  text "O" at 9.101,84.512 h4.6
  text "A" at 12.107,84.512 h4.6
  text "R" at 14.604,84.512 h4.6
  text "D" at 17.187,84.512 h4.6
  text "T" at 20.954,84.512 h4.6
  text "H" at 22.986,84.512 h4.6
  text "I" at 25.992,84.512 h4.6
  text "C" at 27.092,84.512 h4.6
  text "K" at 30.013,84.512 h4.6
  text "N" at 32.426,84.512 h4.6
  text "E" at 35.432,84.512 h4.6
  text "S" at 37.802,84.512 h4.6
  text "S" at 40.173,84.512 h4.6
  text "I" at 43.39,84.512 h4.6
  text "S" at 44.491,84.512 h4.6
  text "1" at 47.75,84.512 h4.6
  text "." at 49.994,84.512 h4.6
  text "6" at 51.221,84.512 h4.6
  text "M" at 53.465,84.512 h4.6
  text "M" at 56.809,84.512 h4.6
  text "." at 60.154,84.512 h4.6
Drill Drawing:
  circle w0.254: c129.644,22.01 r0.847
  lines w0.254: 128.797,13.967 129.22,13.967 129.644,13.544 130.067,13.967 130.49,13.967 130.067,14.39 130.49,14.814 130.067,14.814 129.644,15.237 129.22,14.814 128.797,14.814 129.22,14.39 128.797,13.967 ; 128.797,17.354 130.49,17.354 130.49,19.047 128.797,19.047 128.797,17.354 ; 128.797,26.667 130.49,26.667 129.644,24.974 128.797,26.667
  lines w0.381: 127.278,12.401 416.605,12.401 ; 127.278,27.641 416.605,27.641 ; 141.271,8.591 141.271,31.451 ; 156.253,8.591 156.253,31.451 ; 183.931,8.591 183.931,31.451 ; 196.78,8.591 196.78,31.451 ; 215.418,8.591 215.418,31.451 ; 253.507,8.591 253.507,31.451 ; 268.489,8.591 268.489,31.451 ; 287.432,8.591 287.432,31.451 ; 326.029,8.591 326.029,31.451 ; 347.714,8.591 347.714,31.451 ; 381.588,8.591 381.588,31.451 ; 127.278,8.591 416.605,8.591 416.605,31.451 127.278,31.451 127.278,8.591
  text "Symbol" at 129.564,28.784 h1.83
  text "Count" at 142.414,28.784 h1.83
  text "Hole Size" at 157.396,28.784 h1.83
  text "Plated" at 185.074,28.784 h1.83
  text "Hole Type" at 197.923,28.784 h1.83
  text "Drill Layer Pair" at 216.561,28.784 h1.83
  text "Via/Pad" at 254.65,28.784 h1.83
  text "Pad Shape" at 269.632,28.784 h1.83
  text "Template" at 288.575,28.784 h1.83
  text "Description" at 327.172,28.784 h1.83
  text "Hole Tolerance (+)" at 348.857,28.784 h1.83
  text "Hole Tolerance (-)" at 382.731,28.784 h1.83
  text "3" at 142.414,24.974 h1.52
  text "31.50mil (0.80mm)" at 157.396,24.974 h1.52
  text "PTH" at 185.074,24.974 h1.52
  text "Slot" at 197.923,24.974 h1.52
  text "Top Layer - Bottom Layer" at 216.561,24.974 h1.52
  text "Pad" at 254.65,24.974 h1.52
  text "Rounded" at 269.632,24.974 h1.52
  text "r420_200h80_300r100m0mx0" at 288.575,24.974 h1.52
  text "4" at 142.414,21.164 h1.52
  text "125.98mil (3.20mm)" at 157.396,21.164 h1.52
  text "PTH" at 185.074,21.164 h1.52
  text "Round" at 197.923,21.164 h1.52
  text "Top Layer - Bottom Layer" at 216.561,21.164 h1.52
  text "Pad" at 254.65,21.164 h1.52
  text "Rounded" at 269.632,21.164 h1.52
  text "c600h320m0mx0_2670034071" at 288.575,21.164 h1.52
  text "16" at 142.414,17.354 h1.52
  text "55.12mil (1.40mm)" at 157.396,17.354 h1.52
  text "PTH" at 185.074,17.354 h1.52
  text "Round" at 197.923,17.354 h1.52
  text "Top Layer - Bottom Layer" at 216.561,17.354 h1.52
  text "Pad" at 254.65,17.354 h1.52
  text "Rounded" at 269.632,17.354 h1.52
  text "c250h140m0mx0" at 288.575,17.354 h1.52
  text "172" at 142.414,13.544 h1.52
  text "10.00mil (0.25mm)" at 157.396,13.544 h1.52
  text "PTH" at 185.074,13.544 h1.52
  text "Round" at 197.923,13.544 h1.52
  text "Top Layer - Bottom Layer" at 216.561,13.544 h1.52
  text "Via" at 254.65,13.544 h1.52
  text "Rounded" at 269.632,13.544 h1.52
  text "v51h25m0mx0" at 288.575,13.544 h1.52
  text "195 Total" at 142.414,9.734 h1.52
  text "Slot definitions :" at 129.564,6.051 h1.52
  text "Routed Path Length" at 155.795,6.051 h1.52
  text "= Calculated from tool start centre position to tool end centre position." at 183.802,6.051 h1.52
  text "Hole Length" at 155.795,3.512 h1.52
  text "= Routed Path Length + Tool Size = Slot length as defined in the PCB layout" at 173.392,3.512 h1.52

## Dimensions
101,5 to 118.971,6.959 on dimensions
101,60 to 106,65 on dimensions
101,60 to 106,65 on dimensions
0,65 to 106,65 on dimensions
106,65 to 106,0 on dimensions

## Text inside footprints (layer, text, board x,y; h text height)
C1: Top Overlay "+" at 50.117,39.748 h1 r180; Top Assembly "+" at 50.117,39.748 h1 r180
C2: Top Overlay "+" at 50.117,13.962 h1 r180; Top Assembly "+" at 50.117,13.962 h1 r180
C9: Top Overlay "+" at 40.777,35.75 h1 r180; Top Assembly "+" at 38.983,34.25 h1 r180
C10: Top Overlay "+" at 41.227,33.52 h1 r180; Top Assembly "+" at 39.433,32.02 h1 r180
C11: Top Overlay "+" at 41.227,29.456 h1 r180; Top Assembly "+" at 39.433,27.956 h1 r180
C12: Top Overlay "+" at 41.227,27.551 h1 r180; Top Assembly "+" at 39.433,26.051 h1 r180